# Altium PCB lt3042_pcb.PcbDoc
Units mm, origin at the board's own origin, x right, y up, seen from the top; angles counter-clockwise.
Board outline 13.4 x 13.4 mm, 4 copper layers (Top Layer, Layer 1, Layer 2, Bottom Layer 1), stack 0.775 mm thick; 7 components, 4 nets, 21 pads, 113 vias.
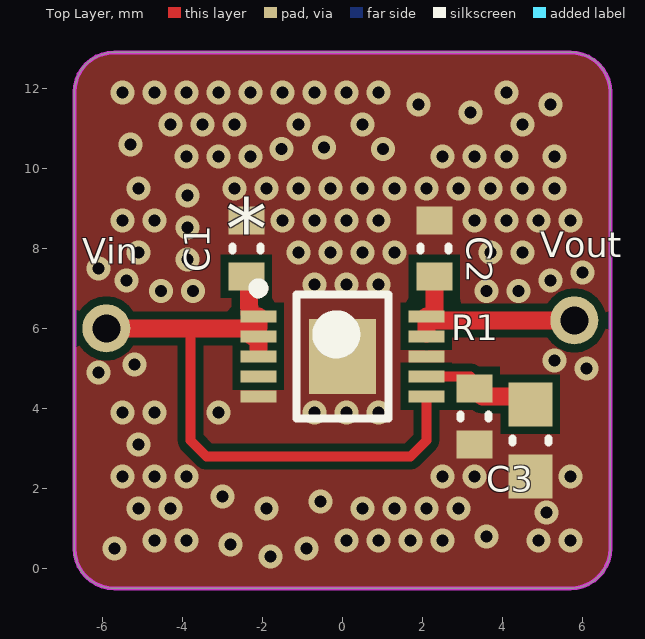
[diagram p0: Top Layer view]
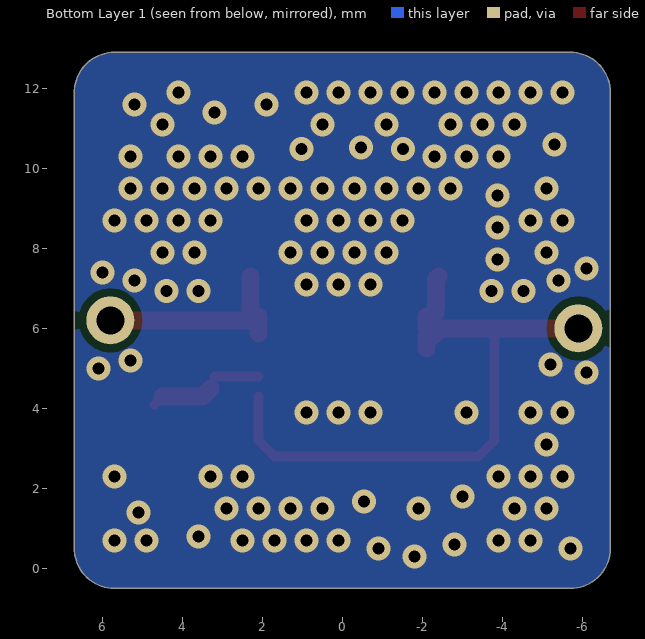
[diagram p1: Bottom Layer 1 view, seen from below]
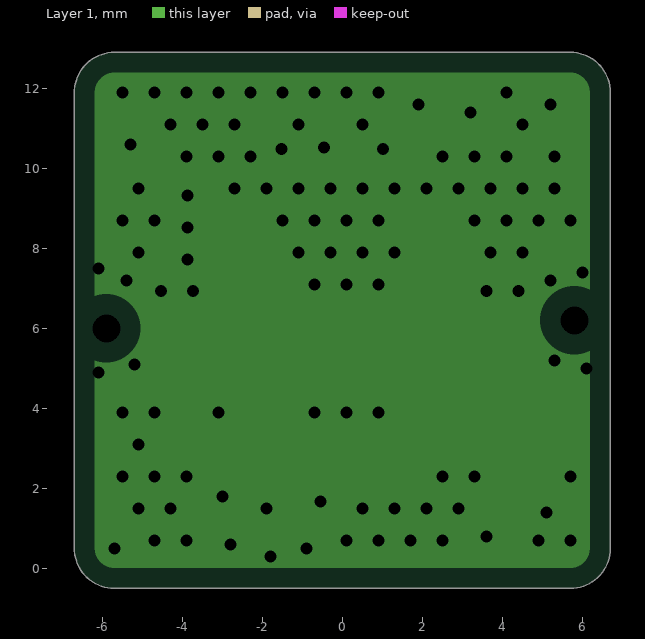
[diagram p2: Layer 1, clearances drawn from the general rule]
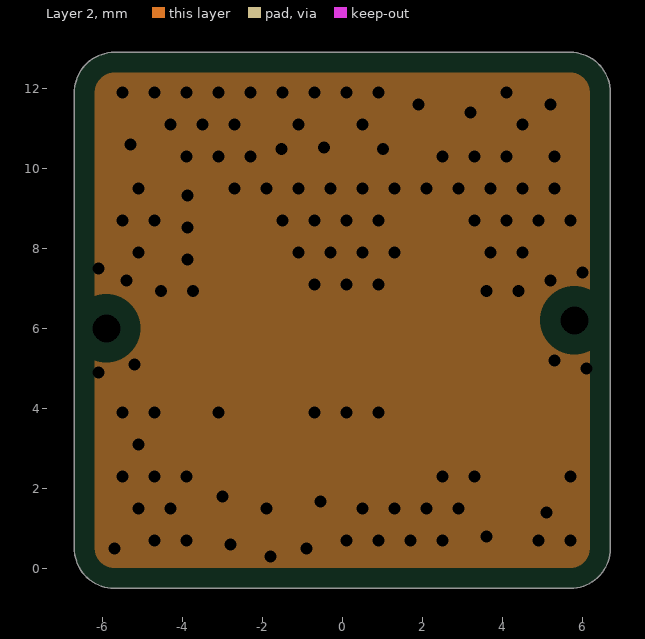
[diagram p3: Layer 2, clearances drawn from the general rule]

## Layer stack, top to bottom
Top Solder: solder mask 0.0102, Solder Resist, Dk 3.5
Top Layer: signal copper 0.035
Dielectric 2: prepreg 0.254, PP-006, Dk 4.1
Layer 1: plane copper 0.035, net GND
Dielectric 1: dielectric 0.127, FR-4, Dk 4.8
Layer 2: plane copper 0.035, net GND
Dielectric 3: prepreg 0.254, PP-006, Dk 4.1
Bottom Layer 1: signal copper 0.035
Bottom Solder: solder mask 0.0102, Solder Resist, Dk 3.5

## Board outline
-6.7,0.5 -6.7,11.9 cw(c-5.7,11.9) -5.7,12.9 5.7,12.9 cw(c5.7,11.9) 6.7,11.9 6.7,0.5 cw(c5.7,0.5) 5.7,-0.5 -5.7,-0.5 cw(c-5.7,0.5)

## Design rules (kind name [scope] priority, off if disabled: settings)
Clearance [All] p1: gap=0.2 ignorepadtopadclearanceinfootprint=FALSE
HoleSize [All] p1: absolutevalues=TRUE maxlimit=5 minlimit=0.3 maxpercent=80.000 minpercent=20.000
PlaneClearance [All] p1: clearance=0.508
PlaneConnect [All] p1: planeconnectstyle=Direct reliefexpansion=0.508 reliefentries=4 reliefconductorwidth=0.254 reliefairgap=0.254
PolygonConnect [All] p1: connectstyle=Direct reliefconductorwidth=0.254 reliefentries=4 polygonreliefangle="90 Angle" airgapwidth=0.254
RoutingVias [All] p1: holewidth=0.711 width=1.27 viastyle="Through Hole" minholewidth=0.711 minwidth=1.27 maxholewidth=0.711 maxwidth=1.27 useviatemplates=TRUE viatemplateguid#1={0DF0FB4D-128F-44F0-A264-6A1C46DBE500} viatemplatename#1=v60h30m0mx0
SolderMaskExpansion [All] p1: expansion=0.102
Width Width_50ohm [InNetClass('50ohm')] p1: maxlimit=0.45 minlimit=0.45 preferedwidth=0.45 impedanceprofiledriven=TRUE impedanceprofileid={D2B77361-9B7D-4BD5-B69E-70E315500705} impedanceprofilevalue=50.000000 minimp=50.000000 maximp=50.000000 favimp=50.000000 checkconnectedcopper=TRUE
Width [All] p2: maxlimit=5 minlimit=0.2 preferedwidth=0.2
27 further rules are at their usual default settings.

## Components (designator, comment, footprint, x,y, rotation, side; value= is the part's Value field where it differs from the comment)
* "LT3042" TSSOP50P490X86-10N 0,5.3 r0 top
C1 "4.7uF" CAPC0603(1608)55_L -2.4,8 r90 top value=4.7u
C2 "4.7uF" CAPC0603(1608)55_L 2.3,8 r90 top value=4.7u
C3 "470nF" 0603-CAP 4.7,3.2 r270 top
R1 "120K" 0603-RES-HD 3.3,3.8 r90 top
Vin "TEST_VIA_RF" "New footprint 1" -5.9,6 r90 top
Vout "TEST_VIA_RF" "New footprint 1" 5.8,6.2 r90 top

## Footprints (in the part's own frame and the unit in brackets; to place one, negate y for a bottom-side part, rotate by r counter-clockwise, add the part's x,y. Pads: shape width x height; smd on the part's side, far side on the other; paste and mask are expansions set on the pad)
0603-CAP [mm] "Chip Capacitor, Body 1.6x0.8mm, Height 0.55mm, IPC Low Density"
  rect 1.1x1.1 smd: 1(-0.9,0) 2(0.9,0)
  silkscreen extent -0.05,-0.45 0.05,0.45, body extent -0.87,-0.47 0.88,0.48, height 0.55
0603-RES-HD [mm] "Chip Resistor, Body 1.6x0.8mm, IPC High Density"
  rect 0.7x0.9 smd: 1(-0.7,0) 2(0.7,0)
  silkscreen extent -0.05,-0.35 0.05,0.35, body extent -0.85,-0.47 0.85,0.47, height 0.6
CAPC0603(1608)55_L [mm] "Chip Capacitor, Body 1.6x0.8mm, Height 0.55mm, IPC High Density"
  rect 0.7x0.9 smd: 1(-0.7,0) 2(0.7,0)
  silkscreen extent -0.05,-0.35 0.05,0.35, body extent -0.87,-0.47 0.88,0.48, height 0.55
"New footprint 1" [mm]
  round 1.2 hole 0.7: 1(0,0)
TSSOP50P490X86-10N [mm] "TSSOP, 10-Leads, Body 3,00x3,00mm, Pitch 0,50mm, IPC Medium Density"
  rect 0.9x0.3 smd: 1(-2.1,1) 2(-2.1,0.5) 3(-2.1,0) 4(-2.1,-0.5) 5(-2.1,-1) 6(2.1,-1) 7(2.1,-0.5) 8(2.1,0) 9(2.1,0.5) 10(2.1,1)
  rect 1.68x1.88 smd: 11(0,0)
  silkscreen extent -2.22,-1.55 1.15,1.82, body extent -1.55,-1.55 1.55,1.55, height 0.86

## Part data
*: library part LT3042-01.A.1, "IC REG LIN POS ADJ 200MA"
C1 C2: library part CC0603-4.7uF-6, "CAP CER 4.7UF 6.3V 10% X5R 0603", Part No=JMK107BJ475KA-T, Cod EMS=05.281.019.510
C3: library part CC0603-470nF-4, "CAP CER 0.47uF 50V 10% X7R 0603", Part No=UMK107B7474KA-TR, Cod EMS=05.281.019.647
R1: library part R0603-120K-1, "RES SMD 120K OHM 1% 1/10W 0603", Part No=ERJ-3EKF1203V, Family=ERJ-3EKF
Vin Vout: library part TEST_VIA_RF-01.A.1, "Test VIA for RF circuits"

## Via types
v1: diameter 0.6, hole 0.3, Top Layer to Bottom Layer 1, 82 vias
v2: diameter 0.6, hole 0.3, Top Layer to Bottom Layer 1, tented both sides, 31 vias

## Nets (pads, with @x,y where several pads share a name; then routed paths per layer and width w, separated by ;. In a path a pad name is that pad's centre, name@x,y a point inside that pad or via, vN(x,y) a via of type N, cw(c..) or ccw(c..) an arc to the next point about the centre after c; other vN are vias at no path point)
GND: *.5 *.8 *.11 C1.2 C2.2 C3.2 R1.1
  other v1: -4.7,0.7 -3.9,0.7 0.1,0.7 0.9,0.7 1.7,0.7 2.5,0.7 4.9,0.7 5.7,0.7 -5.1,1.5 -4.3,1.5 -1.9,1.5 0.5,1.5 1.3,1.5 2.1,1.5 2.9,1.5 -5.5,2.3 -4.7,2.3 -3.9,2.3 2.5,2.3 3.3,2.3 5.7,2.3 -5.1,3.1 -5.5,3.9 -4.7,3.9 -3.1,3.9 -0.7,3.9 0.1,3.9 0.9,3.9 -0.7,7.1 0.1,7.1 0.9,7.1 -5.1,7.9 -1.1,7.9 -0.3,7.9 0.5,7.9 1.3,7.9 3.7,7.9 4.5,7.9 -5.5,8.7 -4.7,8.7 -1.5,8.7 -0.7,8.7 0.1,8.7 0.9,8.7 3.3,8.7 4.1,8.7 4.9,8.7 5.7,8.7 -5.1,9.5 -2.7,9.5 -1.9,9.5 -1.1,9.5 -0.3,9.5 0.5,9.5 1.3,9.5 2.1,9.5 2.9,9.5 3.7,9.5 4.5,9.5 5.3,9.5 -3.9,10.3 -3.1,10.3 -2.3,10.3 2.5,10.3 3.3,10.3 4.1,10.3 -4.3,11.1 -3.5,11.1 -2.7,11.1 -1.1,11.1 0.5,11.1 4.5,11.1 -5.5,11.9 -4.7,11.9 -3.9,11.9 -3.1,11.9 -2.3,11.9 -1.5,11.9 -0.7,11.9 0.1,11.9 0.9,11.9 4.1,11.9
  other v2: -1.8,0.3 -5.7,0.5 -0.9,0.5 -2.8,0.6 3.6,0.8 5.1,1.4 -0.541,1.67 -3,1.8 -6.1,4.9 6.1,5 -5.2,5.1 5.3,5.2 -4.528,6.939 -3.728,6.939 3.599,6.939 4.399,6.939 -5.4,7.2 5.2,7.2 6,7.4 -6.1,7.5 -3.875,7.726 -3.875,8.526 -3.875,9.326 5.3,10.3 -1.52,10.481 1.02,10.481 -0.461,10.52 -5.3,10.6 3.2,11.4 1.9,11.6 5.2,11.6
Net*_1: *.1 *.2 *.3 *.6 C1.1 Vin.1 | length 15.8
  Top Layer w0.25: -3.8,6 -3.8,3.2 -3.4,2.8 1.7,2.8 2.1,3.2 *.6
  Top Layer w0.45: Vin.1 -3.8,6 -2.45,6 -2.25,5.8 *.2 -2.1,5.5 ; C1.1 -2.339,7.239 -2.339,6.539 -2.325,6.525 -2.325,6.375 -2.25,6.3 *.1 -2.1,6.025
Net*_7: *.7 C3.1 R1.2 | length 2.8
  Top Layer w0.25: *.7 R1.2@3.2,4.8 ; R1.2@3.2,4.5 R1.2@3.3,4.4 ; C3.1@4.5,4.3 C3.1
  Top Layer w0.45: R1.2 3.5,4.3 C3.1@4.5,4.3
Net*_9: *.9 *.10 C2.1 Vout.1 | length 5.2
  Top Layer w0.45: *.9@2.1,5.875 *.10 *.10@2.225,6.3 ; C2.1 2.3,6.375 *.10@2.225,6.3 ; Vout.1 2.35,6.2 2.25,6.3 *.10@2.225,6.3
pads on no net: *.4

## Polygon pours and split planes (outlines as drawn)
GND on Bottom Layer 1 "Bottom Layer 1-GND" (solid, pour order 3): -5.7,-0.5 cw(c-5.7,0.5) -6.7,0.5 -6.7,11.9 cw(c-5.7,11.9) -5.7,12.9 5.7,12.9 cw(c5.7,11.9) 6.7,11.9 6.7,0.5 cw(c5.7,0.5) 5.7,-0.5
GND on Top Layer "Top Layer-GND" (solid, pour order 5): -5.7,-0.5 cw(c-5.7,0.5) -6.7,0.5 -6.7,11.9 cw(c-5.7,11.9) -5.7,12.9 5.7,12.9 cw(c5.7,11.9) 6.7,11.9 6.7,0.5 cw(c5.7,0.5) 5.7,-0.5
GND on Layer 1 (split plane): 5.796,12.382 5.888,12.354 5.973,12.309 6.048,12.248 6.109,12.173 6.154,12.088 6.182,11.996 6.191,11.912 6.19,11.9 6.19,0.5 6.191,0.488 6.182,0.404 6.154,0.312 6.109,0.227 6.048,0.152 5.973,0.091 5.888,0.046 5.796,0.018 5.712,0.009 5.7,0.01 -5.7,0.01 -5.712,0.009 -5.796,0.018 -5.888,0.046 -5.973,0.091 -6.048,0.152 -6.109,0.227 -6.154,0.312 -6.182,0.404 -6.191,0.488 -6.19,0.5 -6.19,11.9 -6.191,11.912 -6.182,11.996 -6.154,12.088 -6.109,12.173 -6.048,12.248 -5.973,12.309 -5.888,12.354 -5.796,12.382 -5.712,12.391 -5.7,12.39 5.7,12.39 5.712,12.391
GND on Layer 2 (split plane): 5.796,12.382 5.888,12.354 5.973,12.309 6.048,12.248 6.109,12.173 6.154,12.088 6.182,11.996 6.191,11.912 6.19,11.9 6.19,0.5 6.191,0.488 6.182,0.404 6.154,0.312 6.109,0.227 6.048,0.152 5.973,0.091 5.888,0.046 5.796,0.018 5.712,0.009 5.7,0.01 -5.7,0.01 -5.712,0.009 -5.796,0.018 -5.888,0.046 -5.973,0.091 -6.048,0.152 -6.109,0.227 -6.154,0.312 -6.182,0.404 -6.191,0.488 -6.19,0.5 -6.19,11.9 -6.191,11.912 -6.182,11.996 -6.154,12.088 -6.109,12.173 -6.048,12.248 -5.973,12.309 -5.888,12.354 -5.796,12.382 -5.712,12.391 -5.7,12.39 5.7,12.39 5.712,12.391

## Keep-outs
Top Layer:
  the board outline again, w0.1

## Silkscreen, mask and mechanical layers (free items; w line width, h text height)
Mechanical 1:
  the board outline again, w0.2